# EAGLE board atari2600cartridge (EAGLE 7.2.0)
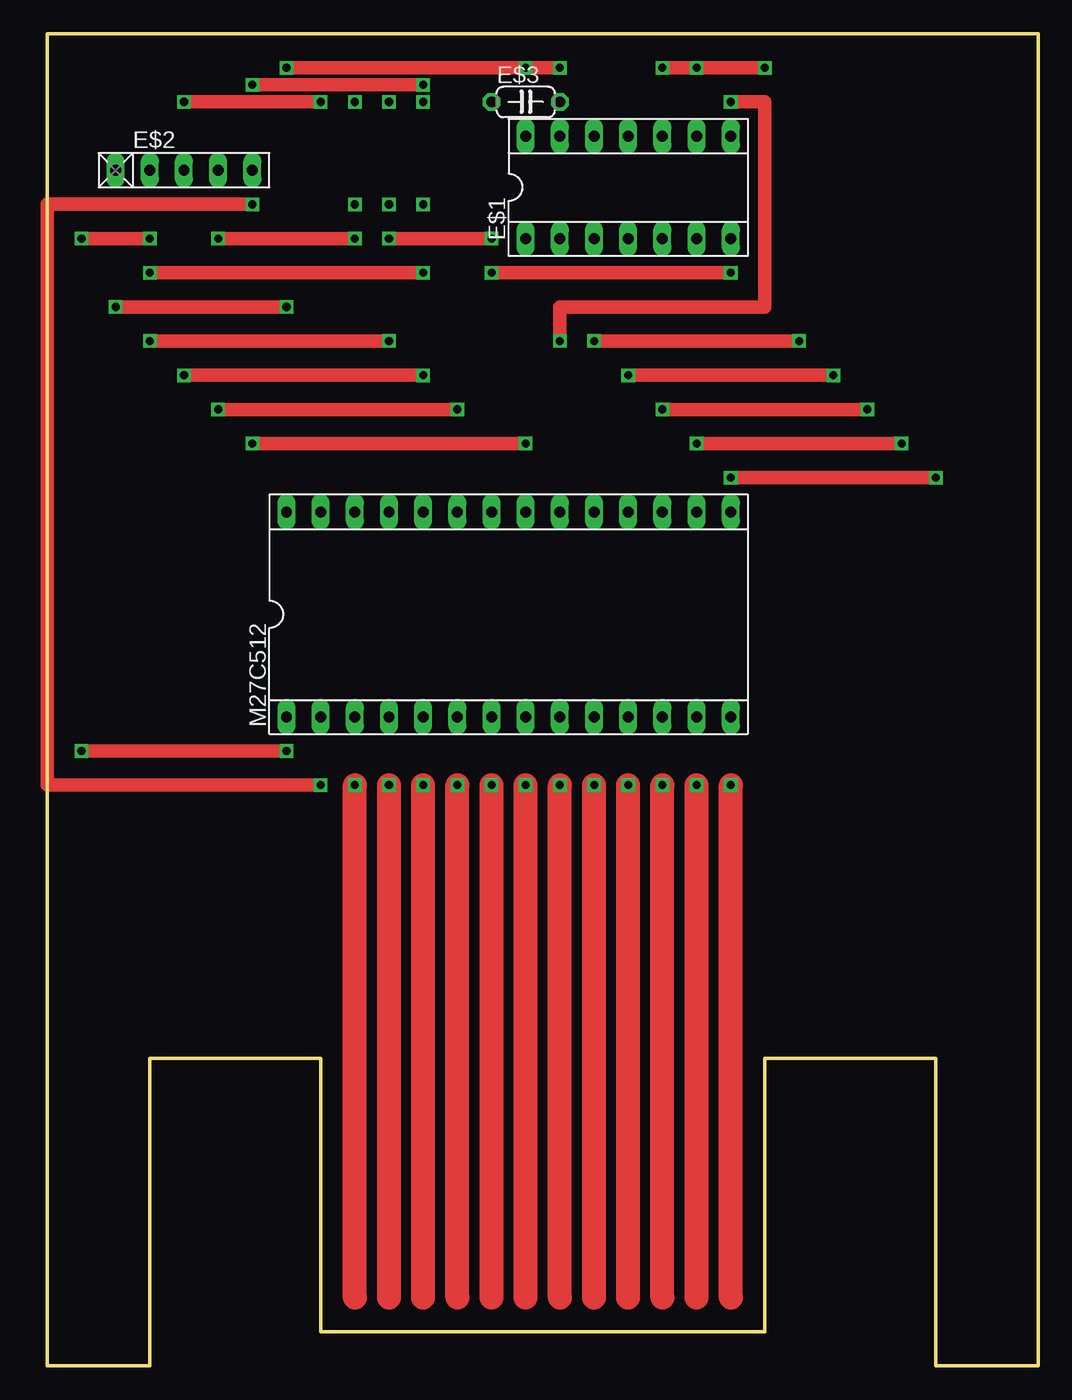
[diagram p0: board, top side]
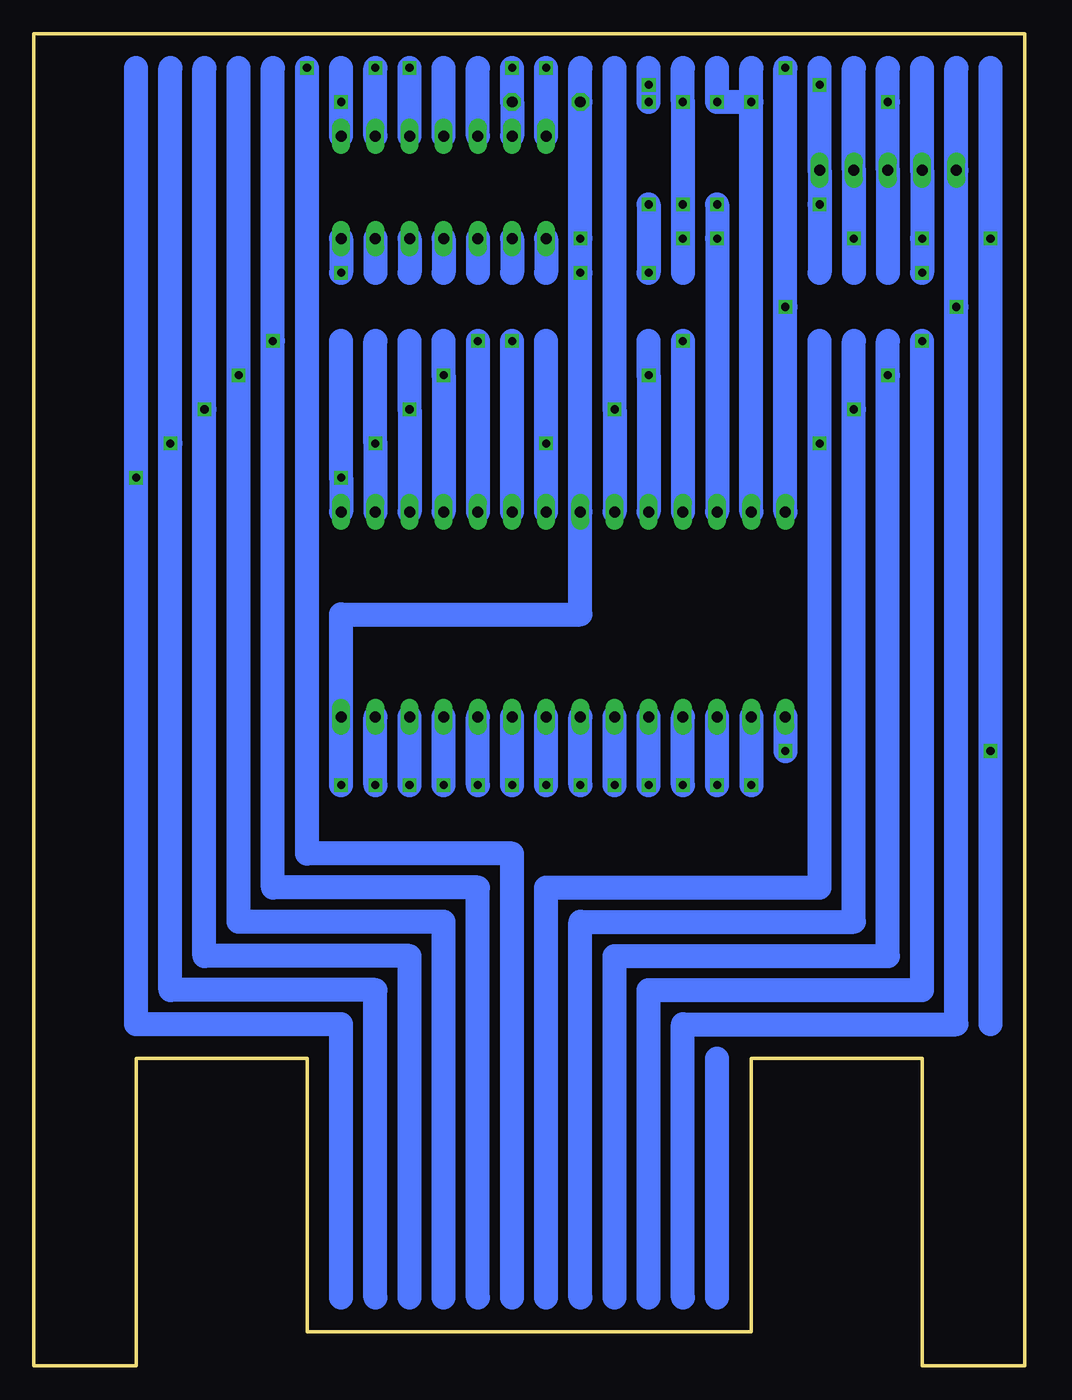
[diagram p1: board, bottom side, seen from below]

Size 73.66 x 99.06 mm. Coordinates in mm from the lower left corner, seen from the top.
Outline: 53.34,22.86 53.34,2.54 20.32,2.54 20.32,22.86 7.62,22.86 7.62,0 0,0 0,99.06 73.66,99.06 73.66,0 66.04,0 66.04,22.86 53.34,22.86
Copper layers (1*16): Top 0.035mm / dielectric 1.5mm / Bottom 0.035mm
Design rules "default": minimum track width 10mil, minimum drill 24mil, track to track 8mil, track to pad 8mil, pad to pad 8mil, via to via 8mil, smd to smd 8mil, copper to edge 40mil, drill to drill 8mil, minimum pad ring 10mil, minimum via ring 8mil, stop-mask expansion 4mil, vias tented up to drill 0mil, thermal gap 10mil

## Footprints (pad centres in the part's own frame; a part is rotated, then mirrored left to right if it is on the bottom)
SOCKET-14 = drill 0.813 long: 1 -7.62,-3.81; 2 -5.08,-3.81; 3 -2.54,-3.81; 4 0,-3.81; 5 2.54,-3.81; 6 5.08,-3.81; 7 7.62,-3.81; 8 7.62,3.81; 9 5.08,3.81; 10 2.54,3.81; 11 0,3.81; 12 -2.54,3.81; 13 -5.08,3.81; 14 -7.62,3.81
RN-5 = drill 0.813 long: 1 -5.08,0; 2 -2.54,0; 3 0,0; 4 2.54,0; 5 5.08,0
C050-024X044 = drill 0.813 octagon: 1 -2.54,0; 2 2.54,0
SOCKET-28-6 = drill 0.813 long: 1 -16.51,-7.62; 2 -13.97,-7.62; 3 -11.43,-7.62; 4 -8.89,-7.62; 5 -6.35,-7.62; 6 -3.81,-7.62; 7 -1.27,-7.62; 8 1.27,-7.62; 9 3.81,-7.62; 10 6.35,-7.62; 11 8.89,-7.62; 12 11.43,-7.62; 13 13.97,-7.62; 14 16.51,-7.62; 15 16.51,7.62; 16 13.97,7.62; 17 11.43,7.62; 18 8.89,7.62; 19 6.35,7.62; 20 3.81,7.62; 21 1.27,7.62; 22 -1.27,7.62; 23 -3.81,7.62; 24 -6.35,7.62; 25 -8.89,7.62; 26 -11.43,7.62; 27 -13.97,7.62; 28 -16.51,7.62

## Placement (x,y rotation side)
E$1  [SOCKET-14]  43.18,87.63 0 top
E$2  [RN-5]  10.16,88.9 0 top
E$3  [C050-024X044]  35.56,93.98 0 top
M27C512  [SOCKET-28-6]  34.29,55.88 0 top

## Library data of the parts
E$1 M27C512 = ic-package
E$2 = resistor-net
E$3 = rcl

## Nets
5V: E$1.13 E$1.14 E$2.1 E$3.2 M27C512.28
A0: M27C512.10
A1: M27C512.9
A2: M27C512.8
A3: M27C512.7
A4: M27C512.6
A5: M27C512.5
A6: M27C512.4
A7: M27C512.3
A8: M27C512.25
A9: M27C512.24
A10: M27C512.21
A11: M27C512.23
A12: E$2.5 M27C512.2
A14: E$2.3 M27C512.27
A15: E$2.2 M27C512.1
CS: E$1.9 E$1.10
D0: M27C512.11
D1: M27C512.12
D2: M27C512.13
D3: M27C512.15
D4: M27C512.16
D5: M27C512.17
D6: M27C512.18
D7: M27C512.19
E: E$1.8 M27C512.20
GND: E$1.7 E$3.1 M27C512.14 M27C512.22
S$2: E$2.4 M27C512.26
S$4: E$1.12
S$5: E$1.11
S$6: E$1.1
S$8: E$1.2
S$13: E$1.3
S$14: E$1.4
S$15: E$1.5
S$16: E$1.6

## Tracks (layer width: path | path; a pad name or v marks a point on that pad's centre or on a via)
5V  (via drill 0.6)
  Top 1.016: v38.1,96.52 v35.56,96.52 v17.78,96.52 | v5.08,78.74 v17.78,78.74
  Bottom 1.778: 25.4,5.08 25.4,25.4 5.08,25.4 v5.08,78.74 E$2.1 5.08,96.52 | E$1.13 E$3.2 v38.1,96.52 | E$1.14 v35.56,96.52 | M27C512.28 v17.78,78.74 v17.78,96.52
A0  (via drill 0.6)
  Top 1.778: 40.64,5.08 v40.64,43.18
  Bottom 1.778: v40.64,43.18 M27C512.10
A1  (via drill 0.6)
  Top 1.778: 38.1,5.08 v38.1,43.18
  Bottom 1.778: v38.1,43.18 M27C512.9
A2  (via drill 0.6)
  Top 1.778: 35.56,5.08 v35.56,43.18
  Bottom 1.778: v35.56,43.18 M27C512.8
A3  (via drill 0.6)
  Top 1.778: 33.02,5.08 v33.02,43.18
  Bottom 1.778: v33.02,43.18 M27C512.7
A4  (via drill 0.6)
  Top 1.778: 30.48,5.08 v30.48,43.18
  Bottom 1.778: v30.48,43.18 M27C512.6
A5  (via drill 0.6)
  Top 1.778: 27.94,5.08 v27.94,43.18
  Bottom 1.778: v27.94,43.18 M27C512.5
A6  (via drill 0.6)
  Top 1.778: 25.4,5.08 v25.4,43.18
  Bottom 1.778: v25.4,43.18 M27C512.4
A7  (via drill 0.6)
  Top 1.778: 22.86,5.08 v22.86,43.18
  Bottom 1.778: v22.86,43.18 M27C512.3
A8  (via drill 0.6)
  Top 1.016: v7.62,76.2 v25.4,76.2
  Bottom 1.778: 27.94,5.08 27.94,27.94 7.62,27.94 v7.62,76.2 | v25.4,76.2 M27C512.25
A9  (via drill 0.6)
  Top 1.016: v10.16,73.66 v27.94,73.66
  Bottom 1.778: 30.48,5.08 30.48,30.48 10.16,30.48 v10.16,73.66 10.16,76.2 | M27C512.24 v27.94,73.66 27.94,76.2
A10  (via drill 0.6)
  Top 1.016: v15.24,68.58 v35.56,68.58
  Bottom 1.778: 35.56,5.08 35.56,35.56 15.24,35.56 v15.24,68.58 15.24,76.2 | M27C512.21 v35.56,68.58 35.56,76.2
A11  (via drill 0.6)
  Top 1.016: v12.7,71.12 v30.48,71.12
  Bottom 1.778: 33.02,5.08 33.02,33.02 12.7,33.02 v12.7,71.12 12.7,76.2 | M27C512.23 v30.48,71.12 30.48,96.52
A12  (via drill 0.6)
  Top 1.016: v20.32,43.18 0,43.18 0,86.36 v15.24,86.36 | v27.94,95.25 v15.24,95.25
  Bottom 1.778: M27C512.2 v20.32,43.18 | v27.94,93.98 v27.94,95.25 27.94,96.52 | 15.24,96.52 v15.24,95.25 E$2.5 v15.24,86.36 15.24,81.28
A14  (via drill 0.6)
  Top 1.016: v20.32,93.98 v10.16,93.98
  Bottom 1.778: 22.86,96.52 v22.86,93.98 v20.32,93.98 | v20.32,93.98 20.32,96.52 | M27C512.27 v20.32,93.98 | 10.16,96.52 v10.16,93.98 E$2.3 10.16,81.28
A15  (via drill 0.6)
  Top 1.016: v17.78,45.72 v2.54,45.72 | v27.94,81.28 v7.62,81.28 | v2.54,83.82 v7.62,83.82
  Bottom 1.778: M27C512.1 v17.78,45.72 | 2.54,96.52 v2.54,83.82 v2.54,45.72 2.54,25.4 | 7.62,96.52 E$2.2 v7.62,83.82 v7.62,81.28 | v27.94,86.36 v27.94,81.28
CS  (via drill 0.6)
  Top 1.016: v53.34,96.52 v48.26,96.52 v45.72,96.52
  Bottom 1.778: 38.1,5.08 38.1,38.1 53.34,38.1 v53.34,96.52 | E$1.9 v48.26,96.52 | E$1.10 v45.72,96.52
D0  (via drill 0.6)
  Top 1.778: 43.18,5.08 v43.18,43.18
  Bottom 1.778: v43.18,43.18 M27C512.11
D1  (via drill 0.6)
  Top 1.778: 45.72,5.08 v45.72,43.18
  Bottom 1.778: v45.72,43.18 M27C512.12
D2  (via drill 0.6)
  Top 1.778: 48.26,5.08 v48.26,43.18
  Bottom 1.778: v48.26,43.18 M27C512.13
D3  (via drill 0.6)
  Top 1.016: v50.8,66.04 v66.04,66.04
  Bottom 1.778: 50.8,5.08 50.8,25.4 66.04,25.4 v66.04,66.04 66.04,96.52 | M27C512.15 v50.8,66.04 50.8,76.2
D4  (via drill 0.6)
  Top 1.016: v48.26,68.58 v63.5,68.58
  Bottom 1.778: 48.26,5.08 48.26,27.94 63.5,27.94 v63.5,68.58 63.5,96.52 | M27C512.16 v48.26,68.58 48.26,76.2
D5  (via drill 0.6)
  Top 1.016: v45.72,71.12 v60.96,71.12
  Bottom 1.778: 45.72,5.08 45.72,30.48 60.96,30.48 v60.96,71.12 60.96,96.52 | M27C512.17 v45.72,71.12 45.72,76.2
D6  (via drill 0.6)
  Top 1.016: v43.18,73.66 v58.42,73.66
  Bottom 1.778: 43.18,5.08 43.18,33.02 58.42,33.02 v58.42,73.66 58.42,96.52 | M27C512.18 v43.18,73.66 43.18,76.2
D7  (via drill 0.6)
  Top 1.016: v40.64,76.2 v55.88,76.2
  Bottom 1.778: 40.64,5.08 40.64,35.56 55.88,35.56 v55.88,76.2 55.88,96.52 | v40.64,76.2 M27C512.19
E  (via drill 0.6)
  Top 1.016: v50.8,93.98 53.34,93.98 53.34,78.74 38.1,78.74 v38.1,76.2
  Bottom 1.778: M27C512.20 v38.1,76.2 | E$1.8 v50.8,93.98 50.8,96.52
GND  (via drill 0.6)
  Top 1.016: v33.02,81.28 v50.8,81.28 | v25.4,83.82 v33.02,83.82
  Top 1.778: 50.8,5.08 v50.8,43.18
  Bottom 1.778: v50.8,43.18 M27C512.14 50.8,55.88 33.02,55.88 M27C512.22 v33.02,81.28 v33.02,83.82 E$3.1 33.02,96.52 | E$1.7 v50.8,81.28 | 25.4,96.52 v25.4,93.98 v25.4,83.82 25.4,81.28
S$2  (via drill 0.6)
  Top 1.016: v12.7,83.82 v22.86,83.82
  Bottom 1.778: 12.7,96.52 E$2.4 v12.7,83.82 12.7,81.28 | v22.86,86.36 v22.86,83.82 M27C512.26
S$4
  Bottom 1.778: E$1.12 40.64,96.52
S$5
  Bottom 1.778: E$1.11 43.18,96.52
S$6
  Bottom 1.778: E$1.1 35.56,81.28
S$7  (via drill 0.6)
  other vias: 25.4,86.36
S$8
  Bottom 1.778: E$1.2 38.1,81.28
S$13
  Bottom 1.778: E$1.3 40.64,81.28
S$14
  Bottom 1.778: E$1.4 43.18,81.28
S$15
  Bottom 1.778: E$1.5 45.72,81.28
S$16
  Bottom 1.778: E$1.6 48.26,81.28
SGND
  Bottom 1.778: 22.86,5.08 22.86,22.86